# EAGLE board SIS Hub (EAGLE 7.4.0)
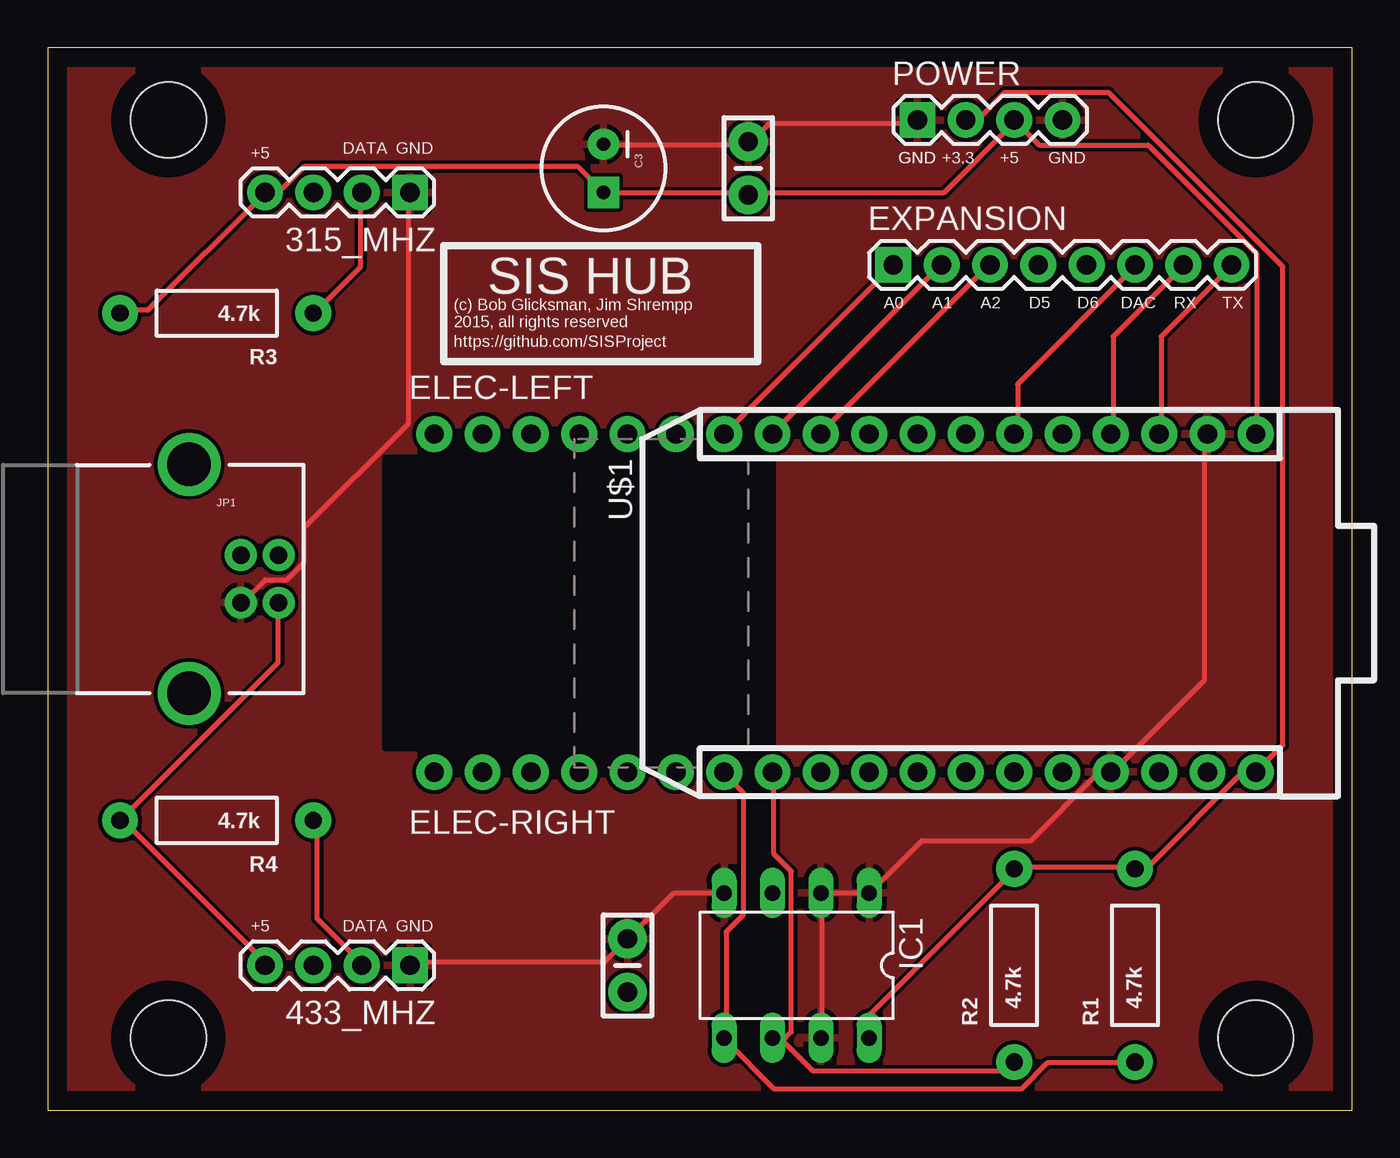
[diagram p0: board, top side]
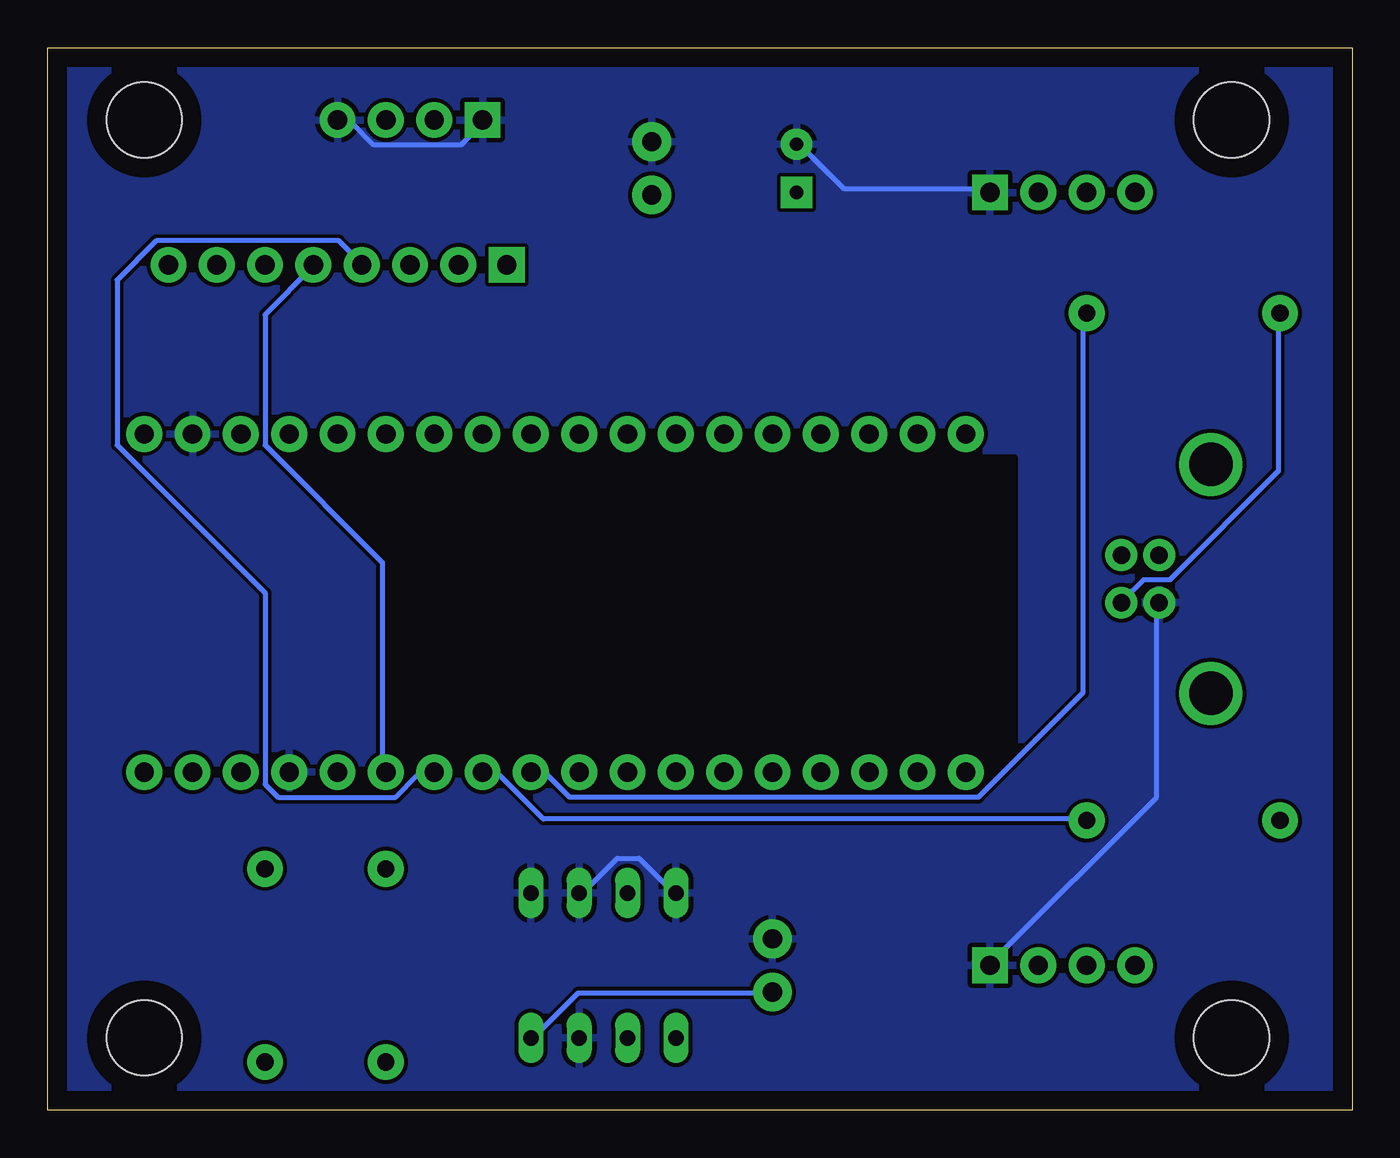
[diagram p1: board, bottom side, seen from below]

Size 68.58 x 55.88 mm. Coordinates in mm from the lower left corner, seen from the top.
Outline: 0,0 68.58,0 68.58,55.88 0,55.87 0,0
Copper layers (1*16): Top 0.035mm / dielectric 1.5mm / Bottom 0.035mm
Design rules "default": minimum track width 10mil, minimum drill 24mil, track to track 8mil, track to pad 8mil, pad to pad 8mil, via to via 8mil, smd to smd 8mil, copper to edge 40mil, drill to drill 8mil, minimum pad ring 10mil, minimum via ring 8mil, stop-mask expansion 4mil, vias tented up to drill 0mil, thermal gap 10mil
Holes 3.96 mm at 6.35,3.81 6.35,52.07 63.5,52.07 63.5,3.81
tRestrict: area 17.8,19.1 to 38.1,34.3
bRestrict: area 17.8,19.1 to 38.1,34.3

## Footprints (pad centres in the part's own frame; a part is rotated, then mirrored left to right if it is on the bottom)
1X04 = drill 1.016 pad 1.88 square: 1 0,0 | drill 1.016 pad 1.88: 2 2.54,0; 3 5.08,0; 4 7.62,0
CAP-PTH-SMALL-KIT = drill 1.016 pad 2.032: 1 -1.397,0; 2 1.397,0
CPOL-RADIAL-100UF-25V = drill 0.7 pad 1.651 square: 1 1.27,0 | drill 0.7 pad 1.651: 2 -1.27,0
1X06_NO_SILK = drill 1.016 pad 1.88: 1 0,0; 2 2.54,0; 3 5.08,0; 4 7.62,0; 5 10.16,0; 6 12.7,0
1X08 = drill 1.016 pad 1.88 square: 1 0,0 | drill 1.016 pad 1.88: 2 2.54,0; 3 5.08,0; 4 7.62,0; 5 10.16,0; 6 12.7,0; 7 15.24,0; 8 17.78,0
DIL08 = drill 0.813 long: 1 -3.81,-3.81; 2 -1.27,-3.81; 3 1.27,-3.81; 4 3.81,-3.81; 5 3.81,3.81; 6 1.27,3.81; 7 -1.27,3.81; 8 -3.81,3.81
USB-B-PTH = drill 0.914 pad 1.676: D+ 0,1.25; D- 1.981,1.25; GND 0,-1.25; VBUS 1.981,-1.25 | drill 2.286: S1 -2.718,-6.02; S2 -2.718,6.02
AXIAL-0.4 = drill 0.9 pad 1.88: P$1 -5.08,0; P$2 5.08,0
PHOTON = drill 1.016 pad 1.88: 1 1.27,32.258; 2 1.27,29.718; 3 1.27,27.178; 4 1.27,24.638; 5 1.27,22.098; 6 1.27,19.558; 7 1.27,17.018; 8 1.27,14.478; 9 1.27,11.938; 10 1.27,9.398; 11 1.27,6.858; 12 1.27,4.318; 13 19.05,4.318; 14 19.05,6.858; 15 19.05,9.398; 16 19.05,11.938; 17 19.05,14.478; 18 19.05,17.018; 19 19.05,19.558; 20 19.05,22.098; 21 19.05,24.638; 22 19.05,27.178; 23 19.05,29.718; 24 19.05,32.258

## Placement (x,y rotation side)
315_MHZ  [1X04]  19.05,48.26 180 top
433_MHZ  [1X04]  19.05,7.62 180 top
C1  0.1uf  [CAP-PTH-SMALL-KIT]  30.48,7.62 90 top
C2  0.1uf  [CAP-PTH-SMALL-KIT]  36.83,49.53 90 top
C3  100uf  [CPOL-RADIAL-100UF-25V]  29.21,49.53 270 top
ELEC-LEFT  [1X06_NO_SILK]  20.32,35.56 0 top
ELEC-RIGHT  [1X06_NO_SILK]  20.32,17.78 0 top
EXPANSION  [1X08]  44.45,44.45 0 top
IC1  AT24LC256  [DIL08]  39.37,7.62 180 top
JP1  USB-B  [USB-B-PTH]  10.16,27.94 0 top
POWER  [1X04]  45.72,52.07 0 top
R1  4.7k  [AXIAL-0.4]  57.15,7.62 90 top
R2  4.7k  [AXIAL-0.4]  50.8,7.62 90 top
R3  4.7k  [AXIAL-0.4]  8.89,41.91 180 top
R4  4.7k  [AXIAL-0.4]  8.89,15.24 180 top
U$1  PHOTON_WITH_HEADERS  [PHOTON]  31.24,36.83 270 top

## Library data of the parts
315_MHZ 433_MHZ POWER = SparkFun-Connectors
C1 C2 = SparkFun-Capacitors
C3 = SparkFun-Capacitors; PROD_ID: CAP-08439
ELEC-LEFT ELEC-RIGHT = SparkFun-Connectors; PROD_ID: CONN-08437
EXPANSION = SparkFun-Connectors; PROD_ID: CONN-08438
IC1 = atmel; MPN: AT24C1024BW-SH-B; OC_FARNELL: 1362646; OC_NEWARK: 03P2044
JP1 = SparkFun-Connectors; PROD_ID: CONN-08278
R1-R4 = SparkFun-Passives
U$1 = Spark

## Nets
5V: 315_MHZ.4 433_MHZ.4 C2.1 C3.1 JP1.VBUS POWER.3 R3.P$2 R4.P$2 U$1.1
GND: 315_MHZ.1 433_MHZ.1 C1.2 C2.2 C3.2 IC1.1 IC1.2 IC1.4 IC1.7 JP1.GND POWER.1 POWER.4 U$1.2 U$1.21
N$1: IC1.5 R1.P$1 U$1.13
N$2: IC1.6 R2.P$1 U$1.14
N$3: 315_MHZ.2 R3.P$1 U$1.16
N$4: 433_MHZ.2 R4.P$1 U$1.17
N$5: EXPANSION.1 U$1.12
N$6: EXPANSION.4 U$1.18
N$7: EXPANSION.8 U$1.3
N$8: EXPANSION.7 U$1.4
N$9: EXPANSION.6 U$1.6
N$10: EXPANSION.3 U$1.10
N$11: EXPANSION.2 U$1.11
N$12: EXPANSION.5 U$1.19
VBAT: U$1.22
VCC: C1.1 IC1.8 POWER.2 R1.P$2 R2.P$2 U$1.24

## Tracks (layer width: path | path; a pad name or v marks a point on that pad's centre or on a via)
5V
  Top 0.254: 3.89,15.32 12.12,23.55 12.12,26.52 JP1.VBUS | 3.89,15.32 11.43,7.77 433_MHZ.4 | 3.89,15.32 R4.P$2 | R3.P$2 3.89,42.06 5.26,42.06 11.43,48.23 315_MHZ.4 11.43,48.46 12.34,48.46 13.49,49.61 27.89,49.61 29.03,48.46 C3.1 29.26,48.23 36.8,48.23 C2.1 37.03,48.23 47.09,48.23 50.75,51.89 POWER.3 52.12,50.75 57.84,50.75 63.55,45.03 63.55,35.66 U$1.1
  Bottom 0.254: JP1.VBUS 12.12,26.75 10.97,27.89 9.6,27.89 3.89,33.6 3.89,41.83 R3.P$2
GND
  Top 0.254: C3.2 29.26,50.75 36.8,50.75 C2.2 37.03,50.98 37.95,51.89 45.72,51.89 POWER.1 | IC1.4 32.92,11.43 30.63,9.14 C1.2 30.4,8.91 29.26,7.77 19.2,7.77 433_MHZ.1 | 40.69,11.43 40.69,3.89 IC1.7 | 40.69,11.43 IC1.1 43.2,11.43 45.95,14.17 51.66,14.17 55.09,17.6 55.78,17.6 U$1.21 56.01,17.83 60.81,22.63 60.81,35.43 U$1.2 | 40.69,11.43 IC1.2 | 315_MHZ.1 18.97,48.23 18.97,36.12 13.49,30.63 13.49,28.8 12.57,27.89 11.43,27.89 10.29,26.75 JP1.GND
  Bottom 0.254: 315_MHZ.1 19.2,48.46 26.75,48.46 29.03,50.75 C3.2 | POWER.4 53.26,51.89 52.58,51.89 51.44,50.75 46.86,50.75 45.72,51.89 POWER.1 | JP1.GND 10.29,26.52 10.29,16.46 18.97,7.77 433_MHZ.1 | IC1.4 35.66,11.43 37.49,13.26 38.63,13.26 40.46,11.43 IC1.2
  pour Bottom: 0,55.88 68.58,55.88 68.58,0 0,0
  pour Top: 0,55.88 68.58,55.88 68.58,0 0,0
  pour Bottom: 0,55.88 68.58,55.88 68.58,0 0,0
N$1
  Top 0.254: U$1.13 35.66,17.6 36.58,16.69 36.58,10.29 35.66,9.37 35.66,3.89 IC1.5 35.66,3.66 38.18,1.14 51.21,1.14 52.58,2.52 57.15,2.52 R1.P$1
N$2
  Top 0.254: 38.63,3.66 38.18,3.66 IC1.6 38.63,3.66 | 38.63,3.66 40.23,2.06 50.29,2.06 50.75,2.52 R2.P$1 | 38.63,3.66 39.09,4.12 39.09,12.57 38.18,13.49 38.18,17.6 U$1.14
N$3
  Top 0.254: 315_MHZ.2 16.46,48.23 16.46,44.35 14.17,42.06 R3.P$1
  Bottom 0.254: U$1.16 42.98,17.6 42.29,17.6 41.15,16.46 19.66,16.46 14.17,21.95 14.17,41.83 R3.P$1
N$4
  Top 0.254: R4.P$1 14.17,15.09 14.17,10.06 16.46,7.77 433_MHZ.2
  Bottom 0.254: U$1.17 45.72,17.6 44.81,17.6 42.52,15.32 14.17,15.32 R4.P$1
N$5
  Top 0.254: EXPANSION.1 U$1.12
N$6
  Bottom 0.254: U$1.18 48.46,17.6 49.15,17.6 50.29,16.46 56.46,16.46 57.15,17.14 57.15,27.2 64.92,34.98 64.92,43.66 62.87,45.72 53.26,45.72 52.12,44.58 EXPANSION.4
N$7
  Top 0.254: U$1.3 58.52,35.66 58.52,40.69 62.18,44.35 EXPANSION.8
N$8
  Top 0.254: U$1.4 56.01,35.66 56.01,40.69 59.66,44.35 EXPANSION.7
N$9
  Top 0.254: U$1.6 50.98,35.66 50.98,38.18 57.15,44.35 EXPANSION.6
N$10
  Top 0.254: U$1.10 40.69,35.66 49.38,44.35 EXPANSION.3
N$11
  Top 0.254: U$1.11 38.18,35.66 46.86,44.35 EXPANSION.2
N$12
  Bottom 0.254: U$1.19 50.98,17.83 50.98,28.8 57.15,34.98 57.15,41.83 54.63,44.35 EXPANSION.5
VCC
  Top 0.254: IC1.8 43.2,3.89 43.2,5.03 50.75,12.57 R2.P$2 50.98,12.8 57.15,12.8 | 57.15,12.8 57.84,12.8 62.64,17.6 63.32,17.6 U$1.24 64.92,19.2 64.92,44.35 55.78,53.49 50.29,53.49 48.92,52.12 48.46,52.12 POWER.2 | 57.15,12.8 R1.P$2
  Bottom 0.254: C1.1 30.63,6.17 40.69,6.17 42.98,3.89 IC1.8

## Text on the board
tPlace: +5 | DATA | GND | GND | GND | +3.3 | +5 | GND | SIS HUB | A0 | A1 | A2 | D5 | D6 | DAC | RX | TX | (c) Bob Glicksman, Jim Shrempp / 2015, all rights reserved | https://github.com/SISProject | +5 | DATA | GND